# Altium PCB laser_show.PcbDoc (part 1 of 2)
Units mm, origin at the board's own origin, x right, y up, seen from the top; angles counter-clockwise.
Board outline 180 x 50 mm, 2 copper layers (Top Layer, Bottom Layer); 129 components, 122 nets, 459 pads, 223 vias.
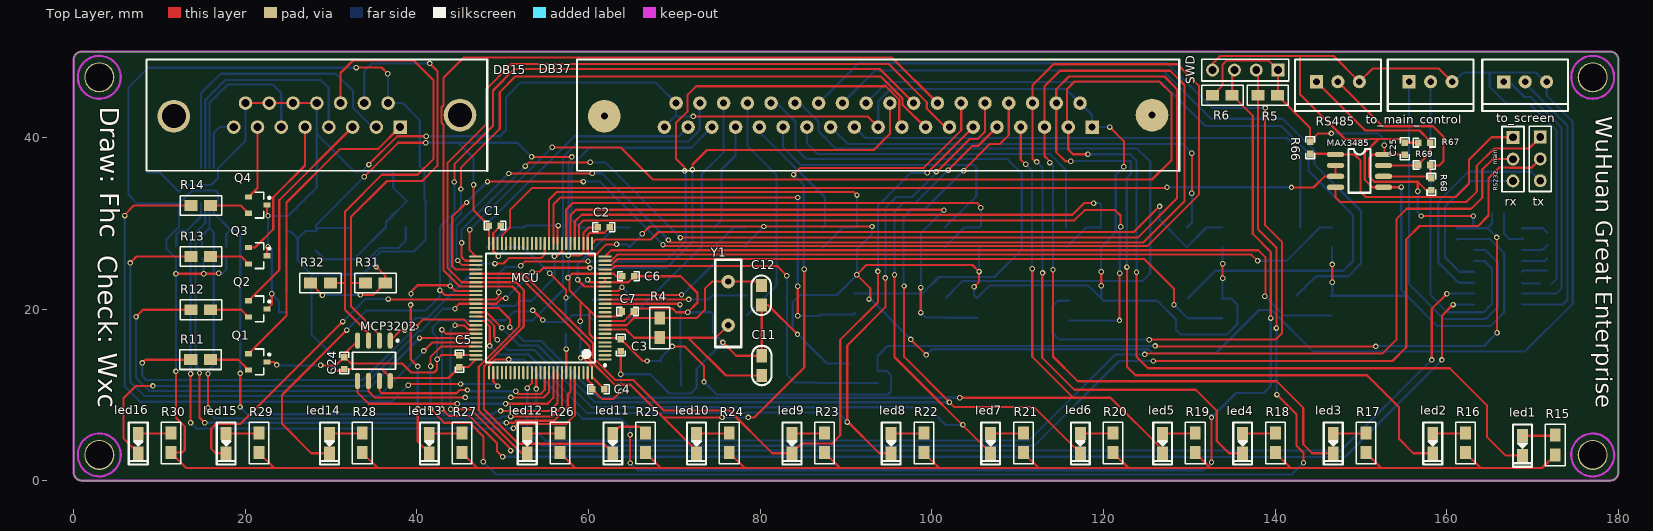
[diagram p0: Top Layer view]
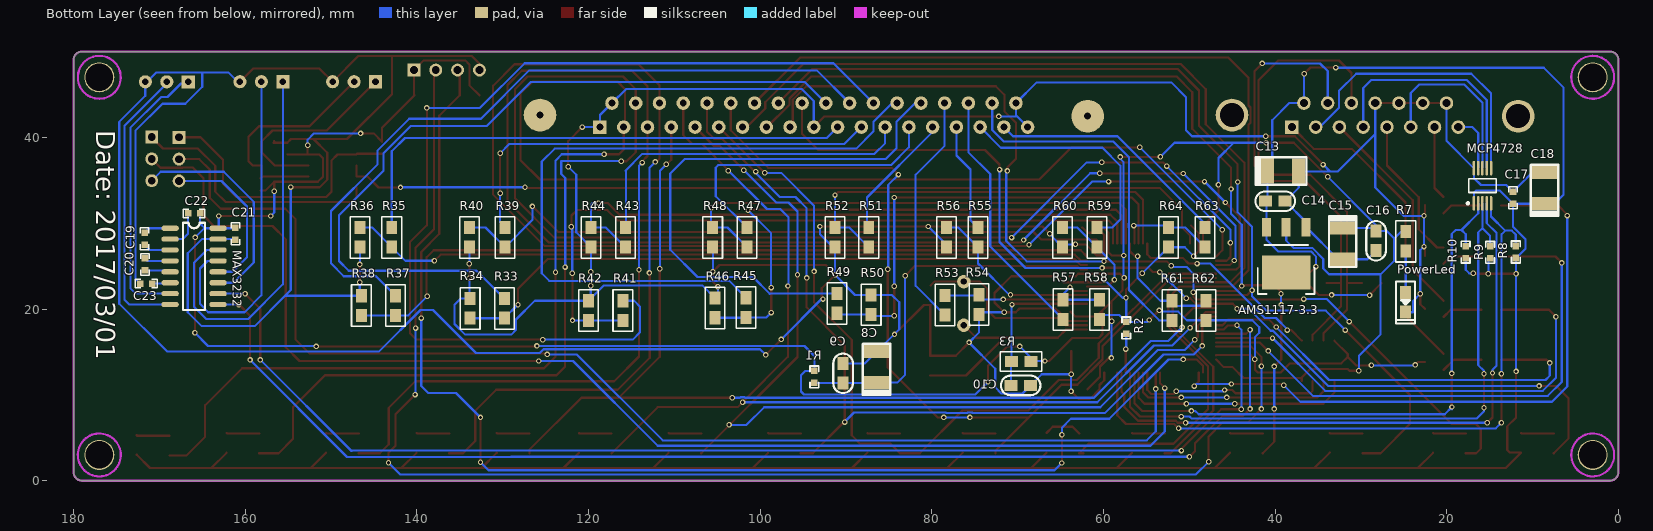
[diagram p1: Bottom Layer view, seen from below]

## Layer stack, top to bottom
Top Solder: solder mask 0.0102, Solder Resist, Dk 3.5
Top Layer: signal copper 0.0356
Dielectric 1: dielectric 0.32, FR-4, Dk 4.8
Bottom Layer: signal copper 0.0356
Bottom Solder: solder mask 0.0102, Solder Resist, Dk 3.5

## Board outline
1,0 cw(c1,1) 0,1 0,49 cw(c1,49) 1,50 179,50 cw(c179,49) 180,49 180,1 cw(c179,1) 179,0

## Design rules (kind name [scope] priority, off if disabled: settings)
Clearance [All] p1: gap=0.127 ignorepadtopadclearanceinfootprint=FALSE
PolygonConnect [All] p1: connectstyle=Relief reliefconductorwidth=0.254 reliefentries=4 polygonreliefangle="90 Angle" airgapwidth=0.254
RoutingVias [All] p1: holewidth=0.711 width=1.27 viastyle="Through Hole" minholewidth=0.381 minwidth=0.508 maxholewidth=0.711 maxwidth=1.27
SolderMaskExpansion [All] p1: expansion=0.102
Width [All] p1: maxlimit=0.254 minlimit=0.254 preferedwidth=0.254
30 further rules are at their usual default settings.

## Classes and differential pairs
component class laser_show_adc_uart: C19 C20 C21 C22 C23 C24 C25 MAX3232 MAX3485 MCP3202 R33 R34 R35 R36 R37 R38 R39 R40 R41 R42 R43 R44 R45 R46 R47 R48 R49 R50 R51 R52 R53 R54 R55 R56 R57 R58 R59 R60 R61 R62 R63 R64 R66 R67 R68 R69 RS485 rx to_main_control "to_main_control " to_screen tx
component class laser_show_peripheral: AMS1117-3.3 C13 C14 C15 C16 C17 C18 DB15 DB37 led1 led2 led3 led4 led5 led6 led7 led8 led9 led10 led11 led12 led13 led14 led15 led16 MCP4728 PowerLed Q1 Q2 Q3 Q4 R7 R8 R9 R10 R11 R12 R13 R14 R15 R16 R17 R18 R19 R20 R21 R22 R23 R24 R25 R26 R27 R28 R29 R30 R31 R32
component class laser_show_core: C1 C2 C3 C4 C5 C6 C7 C8 C9 C10 C11 C12 MCU R1 R2 R3 R4 R5 R6 SWD Y1

## Components (designator, comment, footprint, x,y, rotation, side; value= is the part's Value field where it differs from the comment)
AMS1117-3.3 "ASM1117" ASM1117 38.708,26.904 r0 bottom
C1 "104" 0603C 49.094,29.718 r180 top
C2 "104" 0603C 61.769,29.515 r180 top
C3 "104" 0603C 63.75,15.799 r90 top
C4 "104" 0603C 61.159,10.643 r0 top
C5 "104" 0603C 44.954,13.932 r270 top
C6 "104" 0603C 64.652,23.825 r180 top
C7 "104" 0603C 64.55,19.71 r180 top
C8 "10uF" 0805CAP_POL 86.433,13.233 r270 bottom
C9 "104" 0805C 90.344,12.522 r270 bottom
C10 "104" 0805C 69.643,11.1 r0 bottom
C11 "20pF" 0805C 80.184,13.411 r90 top
C12 "20pF" 0805C 80.133,21.615 r270 top
C13 "10uF" 0805CAP_POL 39.061,36.068 r0 bottom
C14 "104" 0805C 39.976,32.563 r0 bottom
C15 "10uF" 0805CAP_POL 32.153,27.61 r90 bottom
C16 "104" 0805C 28.241,27.94 r90 bottom
C17 "0.1uF" 0603C 12.29,32.969 r270 bottom
C18 "10uF" 0805CAP_POL 8.607,34.087 r270 bottom
C19 "0.1uF" 0603C 171.726,28.194 r90 bottom
C20 "0.1uF" 0603C 171.675,25.197 r90 bottom
C21 "0.1uF" 0603C 161.134,28.778 r270 bottom
C22 "0.1uF" 0603C 165.96,31.14 r180 bottom
C23 "0.1uF" 0603C 171.522,22.962 r180 bottom
C24 "0.1uF" 0603C 31.547,13.703 r270 top
C25 "0.1uF" 0603C 155.089,38.684 r90 top
DB15 "DB15" DB15/M 38.045,41.199 r0 top
DB37 "DB37" DB37/M 118.665,41.199 r0 top
led1 "red" 0805-LED 168.826,4.089 r270 top
led2 "red" 0805-LED 158.359,4.343 r270 top
led3 "red" 0805-LED 146.768,4.343 r270 top
led4 "red" 0805-LED 136.218,4.343 r270 top
led5 "red" 0805-LED 126.888,4.343 r270 top
led6 "red" 0805-LED 117.303,4.343 r270 top
led7 "red" 0805-LED 106.855,4.343 r270 top
led8 "red" 0805-LED 95.264,4.343 r270 top
led9 "red" 0805-LED 83.699,4.343 r270 top
led10 "red" 0805-LED 72.59,4.343 r270 top
led11 "red" 0805-LED 62.828,4.343 r270 top
led12 "red" 0805-LED 52.863,4.343 r270 top
led13 "red" 0805-LED 41.449,4.343 r270 top
led14 "red" 0805-LED 29.833,4.343 r270 top
led15 "red" 0805-LED 17.785,4.343 r270 top
led16 "red" 0805-LED 7.54,4.343 r270 top
MAX3232 "MAX3232" SO-16 168.754,29.413 r180 bottom
MAX3485 "MAX3485" so-8 147.037,37.998 r0 top
MCP3202 "MCP3202" SOIC8N_L 35.001,13.97 r270 top
MCP4728 "MCP4728" MSOP10 15.847,34.366 r90 bottom
MCU "STM32F1013VE" LQFP100_L 54.403,20.117 r180 top
PowerLed "Green" 0805-LED 24.812,20.777 r270 bottom
Q1 "9013" SOT23_L 21.459,13.843 r0 top
Q2 "9013" SOT23_L 21.459,20.015 r0 top
Q3 "9013" SOT23_L 21.459,26.213 r0 top
Q4 "9013" SOT23_L 21.459,32.106 r0 top
R1 "0" 0603R 93.675,12.09 r90 bottom
R2 "10K" 0603R 57.349,17.805 r270 bottom
R3 "10K" 0805R 69.592,13.868 r0 bottom
R4 "1M" 0805R 68.297,17.805 r270 top
R5 "10K" 0805R 139.137,44.907 r180 top
R6 "10K" 0805R 133.854,44.907 r0 top
R7 "1K" 0805R 24.787,27.889 r90 bottom
R8 "100K" 0603R 11.96,26.645 r270 bottom
R9 "10K" 0603R 14.957,26.594 r270 bottom
R10 "10K" 0603R 17.802,26.619 r270 bottom
R11 "10K" 0805R 14.804,14.097 r0 top
R12 "10K" 0805R 14.83,19.914 r0 top
R13 "10K" 0805R 14.83,26.111 r0 top
R14 "10K" 0805R 14.83,32.055 r0 top
R15 "1K" 0805R 172.633,4.156 r90 top
R16 "1K" 0805R 162.167,4.41 r90 top
R17 "1K" 0805R 150.575,4.41 r90 top
R18 "1K" 0805R 140.026,4.41 r90 top
R19 "1K" 0805R 130.695,4.41 r90 top
R20 "1K" 0805R 121.111,4.41 r90 top
R21 "1K" 0805R 110.663,4.41 r90 top
R22 "1K" 0805R 99.072,4.41 r90 top
R23 "1K" 0805R 87.506,4.41 r90 top
R24 "1K" 0805R 76.398,4.41 r90 top
R25 "1K" 0805R 66.636,4.41 r90 top
R26 "1K" 0805R 56.67,4.41 r90 top
R27 "1K" 0805R 45.257,4.41 r90 top
R28 "1K" 0805R 33.641,4.41 r90 top
R29 "1K" 0805R 21.592,4.41 r90 top
R30 "1K" 0805R 11.348,4.41 r90 top
R31 "10K" 0805R 35.175,23.038 r180 top
R32 "10K" 0805R 28.774,23.038 r0 top
R33 "10K" 0805R 129.805,20.074 r270 bottom
R34 "10K" 0805R 133.788,20.074 r90 bottom
R35 "10K" 0805R 142.922,28.346 r270 bottom
R36 "10K" 0805R 146.63,28.346 r270 bottom
R37 "10K" 0805R 142.488,20.404 r270 bottom
R38 "10K" 0805R 146.472,20.404 r90 bottom
R39 "10K" 0805R 129.714,28.346 r270 bottom
R40 "10K" 0805R 133.88,28.346 r270 bottom
R41 "10K" 0805R 116.005,19.82 r270 bottom
R42 "10K" 0805R 119.988,19.82 r90 bottom
R43 "10K" 0805R 115.693,28.346 r270 bottom
R44 "10K" 0805R 119.706,28.346 r270 bottom
R45 "10K" 0805R 101.647,20.168 r270 bottom
R46 "10K" 0805R 105.265,20.125 r90 bottom
R47 "10K" 0805R 101.52,28.346 r270 bottom
R48 "10K" 0805R 105.533,28.346 r270 bottom
R49 "10K" 0805R 91.03,20.65 r270 bottom
R50 "10K" 0805R 87.067,20.498 r90 bottom
R51 "10K" 0805R 87.347,28.346 r270 bottom
R52 "10K" 0805R 91.284,28.346 r270 bottom
R53 "10K" 0805R 78.482,20.447 r90 bottom
R54 "10K" 0805R 74.52,20.523 r270 bottom
R55 "10K" 0805R 74.621,28.346 r270 bottom
R56 "10K" 0805R 78.304,28.346 r270 bottom
R57 "10K" 0805R 64.715,19.939 r90 bottom
R58 "10K" 0805R 60.448,19.939 r270 bottom
R59 "10K" 0805R 60.753,28.346 r270 bottom
R60 "10K" 0805R 64.766,28.346 r270 bottom
R61 "10K" 0805R 52.036,19.82 r90 bottom
R62 "10K" 0805R 48.053,19.82 r270 bottom
R63 "10K" 0805R 48.18,28.346 r270 bottom
R64 "10K" 0805R 52.422,28.346 r270 bottom
R66 "10K" 0603R 144.065,38.798 r90 top
R67 "3.3K" 0603R 157.375,39.395 r180 top
R68 "3.3K" 0603R 158.213,34.519 r90 top
R69 "120" 0603R 157.391,36.779 r0 top
RS485 "Header 3" XH2.54_3P_Vertical 147.316,46.482 r270 top
rx "main" HDR1X3 167.712,40.005 r270 top
SWD "SWD" HDR1X4 140.331,47.839 r180 top
to_main_control "RS232_Connector" XH2.54_3P_Vertical 158.111,46.482 r270 top (schematic designator to_screen)
to_screen "RS232_Connector" XH2.54_3P_Vertical 169.135,46.473 r270 top (schematic designator to_main_control)
tx "RS232" HDR1X3 170.887,40.03 r270 top
Y1 "8M" XTAL1 76.276,18.11 r90 top

## Footprints (in the part's own frame and the unit in brackets; to place one, negate y for a bottom-side part, rotate by r counter-clockwise, add the part's x,y. Pads: shape width x height; smd on the part's side, far side on the other; paste and mask are expansions set on the pad)
0603C [mil]
  rect 30x30 smd: 1(-27.5,0) 2(27.5,0)
  silkscreen extent -50,-20 50,20
0603R [mil]
  rect 30x30 smd: 1(-27.5,0) 2(27.5,0)
  silkscreen extent -50,-20 50,20
0805-LED [mil]
  rect 60x50 smd: 1(-45,0) 2(45,0)
  silkscreen extent -96,-43 97,43
0805C [mil] "capacitance"
  rect 60x50 smd: 1(-45,0) 2(45,0)
  silkscreen extent -90,-45 91,45
0805CAP_POL [mm] "CAP_POLAR"
  rect 1.524x3 smd: 1(1.813,-0.038) 2(-1.813,0.038)
  silkscreen extent -2.71,-1.61 3.21,1.59
0805R [mil] "resistor"
  rect 60x50 smd: 1(45,0) 2(-45,0)
  silkscreen extent -95,-45 95,45
ASM1117 [mm] "ASM1117"
  rect 1.05x2.15 smd: 1(-2.3,-2.647) 2(0,-2.647) 3(2.3,-2.647)
  rect 5.6x4 smd: ""(-0.002,2.647)
  silkscreen extent -3.28,-0.55 3.32,5.14
DB15/M [mil]
  rect 62x62 hole 38: 1(0,0)
  round 62 hole 38: 2(-109,0) 3(-218,0) 4(-327,0) 5(-436,0) 6(-545,0) 7(-654,0) 8(-763,0) 9(-55,110) 10(-164,110) 11(-273,110) 12(-382,110) 13(-491,110) 14(-600,110) 15(-709,110)
  round 150 hole 110: ""(-1038,50) ""(275,55)
  silkscreen extent -1163,-200 400,310
DB37/M [mil]
  round 150 hole 32: 0(-2237,50) 0(275,55)
  rect 62x62 hole 32: 1(0,0)
  round 62 hole 32: 2(-109,0) 3(-218,0) 4(-327,0) 5(-436,0) 6(-545,0) 7(-654,0) 8(-763,0) 9(-872,0) 10(-981,0) 11(-1090,0) 12(-1199,0) 13(-1308,0) 14(-1417,0) 15(-1526,0) 16(-1635,0) 17(-1744,0) 18(-1853,0) 19(-1962,0) 20(-55,110) 21(-164,110) 22(-273,110) 23(-382,110) 24(-491,110) 25(-600,110) 26(-709,110) 27(-818,110) 28(-927,110) 29(-1036,110) 30(-1145,110) 31(-1254,110) 32(-1363,110) 33(-1472,110) 34(-1581,110) 35(-1690,110) 36(-1799,110) 37(-1908,110)
  silkscreen extent -2362,-200 400,310
HDR1X3 [mm] "Connector; Header; 3 Position"
  rect 1.5x1.5 hole 0.9: 1(0,0)
  round 1.5 hole 0.9: 2(2.54,0) 3(5.08,0)
  silkscreen extent -1.27,-1.27 6.35,1.27
HDR1X4 [mm] "Connector; Header; 4 Position"
  rect 1.5x1.5 hole 0.9: 1(0,0)
  round 1.5 hole 0.9: 2(2.54,0) 3(5.08,0) 4(7.62,0)
  silkscreen extent -1.27,-1.27 8.89,1.27
LQFP100_L [mm]
  oval 1.55x0.25 smd: 1(-7.525,6) 2(-7.525,5.5) 3(-7.525,5) 4(-7.525,4.5) 5(-7.525,4) 6(-7.525,3.5) 7(-7.525,3) 8(-7.525,2.5) 9(-7.525,2) 10(-7.525,1.5) 11(-7.525,1) 12(-7.525,0.5) 13(-7.525,0) 14(-7.525,-0.5) 15(-7.525,-1) 16(-7.525,-1.5) 17(-7.525,-2) 18(-7.525,-2.5) 19(-7.525,-3) 20(-7.525,-3.5) 21(-7.525,-4) 22(-7.525,-4.5) 23(-7.525,-5) 24(-7.525,-5.5) 25(-7.525,-6) 51(7.525,-6) 52(7.525,-5.5) 53(7.525,-5) 54(7.525,-4.5) 55(7.525,-4) 56(7.525,-3.5) 57(7.525,-3) 58(7.525,-2.5) 59(7.525,-2) 60(7.525,-1.5) 61(7.525,-1) 62(7.525,-0.5) 63(7.525,0) 64(7.525,0.5) 65(7.525,1) 66(7.525,1.5) 67(7.525,2) 68(7.525,2.5) 69(7.525,3) 70(7.525,3.5) 71(7.525,4) 72(7.525,4.5) 73(7.525,5) 74(7.525,5.5) 75(7.525,6)
  oval 0.25x1.55 smd: 26(-6,-7.525) 27(-5.5,-7.525) 28(-5,-7.525) 29(-4.5,-7.525) 30(-4,-7.525) 31(-3.5,-7.525) 32(-3,-7.525) 33(-2.5,-7.525) 34(-2,-7.525) 35(-1.5,-7.525) 36(-1,-7.525) 37(-0.5,-7.525) 38(0,-7.525) 39(0.5,-7.525) 40(1,-7.525) 41(1.5,-7.525) 42(2,-7.525) 43(2.5,-7.525) 44(3,-7.525) 45(3.5,-7.525) 46(4,-7.525) 47(4.5,-7.525) 48(5,-7.525) 49(5.5,-7.525) 50(6,-7.525) 76(6,7.525) 77(5.5,7.525) 78(5,7.525) 79(4.5,7.525) 80(4,7.525) 81(3.5,7.525) 82(3,7.525) 83(2.5,7.525) 84(2,7.525) 85(1.5,7.525) 86(1,7.525) 87(0.5,7.525) 88(0,7.525) 89(-0.5,7.525) 90(-1,7.525) 91(-1.5,7.525) 92(-2,7.525) 93(-2.5,7.525) 94(-3,7.525) 95(-3.5,7.525) 96(-4,7.525) 97(-4.5,7.525) 98(-5,7.525) 99(-5.5,7.525) 100(-6,7.525)
  silkscreen extent -7.65,-6.35 6.35,6.8
MSOP10 [mm] "MCP4728"
  oval 1.7x0.3 smd: 1(-2.05,1) 2(-2.05,0.5) 3(-2.05,0) 4(-2.05,-0.5) 5(-2.05,-1) 6(2.05,-1) 7(2.05,-0.5) 8(2.05,0) 9(2.05,0.5) 10(2.05,1)
  silkscreen extent -2.17,-1.6 0.8,1.83, body extent -1.6,-1.6 1.6,1.6, height 1.1
so-8 [mil]
  oval 80x24 smd: 1(0,0) 2(0,-50) 3(0,-100) 4(0,-150) 5(220,-150) 6(220,-100) 7(220,-50) 8(220,0)
  silkscreen extent 60,-175 160,25
SO-16 [mil]
  oval 80x24 smd: 1(0,0) 2(0,-50) 3(0,-100) 4(0,-150) 5(0,-200) 6(0,-250) 7(0,-300) 8(0,-350) 9(220,-350) 10(220,-300) 11(220,-250) 12(220,-200) 13(220,-150) 14(220,-100) 15(220,-50) 16(220,0)
  silkscreen extent 60,-375 160,25
SOIC8N_L [mm] "8-Pin Small Outline Integrated Circuit 1.27 mm Pitch, IPC High Density"
  oval 1.9x0.6 smd: 1(-2.35,1.905) 2(-2.35,0.635) 3(-2.35,-0.635) 4(-2.35,-1.905) 5(2.35,-1.905) 6(2.35,-0.635) 7(2.35,0.635) 8(2.35,1.905)
  silkscreen extent -2.47,-2.5 1,2.88, body extent -1.95,-2.45 1.95,2.45, height 1.75
SOT23_L [mm] "SOT23, 3-Leads, Body 2.9x1.3mm, Pitch 0.95mm, Lead Span 2.3mm - Reverse Pinning, IPC High Density"
  rect 0.85x0.6 smd: 1(1.075,0) 2(-1.075,-0.95) 3(-1.075,0.95)
  silkscreen extent -0.3,-1.5 1.48,1.5, body extent -0.7,-1.5 0.7,1.5, height 1.1
XH2.54_3P_Vertical [mil]
  rect 60x60 hole 30: 1(0,-98.43)
  round 60 hole 30: 2(0,0) 3(0,98.43)
  silkscreen extent -102,-197 134,197
XTAL1 [mil]
  round 62 hole 28: 1(0,0) 2(200,0)
  silkscreen extent -100,-60 300,60

## Part data
C1 C2 C3 C4 C5 C6 C7 C9 C14 C16 C17 C19 C20 C21 C22 C23 C24 C25: library part CAP, "capacitance"
C8 C13 C15 C18: library part CAP_Polar, "Cap polar"
C10 C11 C12: library part Cap, "capacitance"
led1 led2 led3 led4 led5 led6 led7 led8 led9 led10 led11 led12 led13 led14 led15 led16 PowerLed: library part LED, "LED"
MAX3232: library part MAX232, "+5V Powered, Multi-Channel RS-232 Driver/Receiver", Code_IPC=SOIC127P600-16, Code_JEDEC=MS-012-AC, ComponentLink1Description="Manufacturer Link", ComponentLink1URL=http://www.maxim-ic.com/, ComponentLink2Description=Datasheet, ComponentLink2URL=http://pdfserv.maxim-ic.com/en/ds/MAX220-MAX249.pdf, LatestRevisionDate=13-Apr-2006, LatestRevisionNote="IPC-7351 Footprint Added.", PackageDescription="16-Pin Small Outline Integrated Circuit 1.27 mm Pitch", PackageReference=NSO16, Published=16-Jan-2001, Publisher="Altium Limited"
MAX3485: library part MAX485
MCU: library part STM32F103VET6, "STM32F1013VET6"
Q1 Q2 Q3 Q4: library part 2N3904, "NPN General Purpose Amplifier", ComponentLink1Description="Manufacturer Link", ComponentLink1URL=http://www.fairchildsemi.com/, ComponentLink2Description=Datasheet, ComponentLink2URL=http://www.fairchildsemi.com/ds/2N%2F2N3904.pdf, DatasheetVersion=1997, LatestRevisionDate=15-Jan-2003, LatestRevisionNote="PCB Footprint 'BCY-W3/D4.7' replaced", PackageDescription="TO, Flat Index; 3 In-Line, Axial Leads; Body Dia. 4.5mm; Leads 0.51 x 0.48 mm (max)", PackageReference=TO-92A, PackageVersion=Sep-1998, Published=8-Jun-2000, Publisher="Altium Limited"
R1 R2 R5 R6 R7 R8 R9 R10 R11 R12 R13 R14 R15 R16 R17 R18 R19 R20 R21 R22 R23 R24 R25 R26 R27 R28 R29 R30 R31 R32 R33 R34 R35 R36 R37 R38 R39 R40 R41 R42 R43 R44 R45 R46 R47 R48 R49 R50 R51 R52 R53 R54 R55 R56 R57 R58 R59 R60 R61 R62 R63 R64 R66 R67 R68 R69: library part RES, "resistor"
R3 R4: library part Res, "resistor"
RS485: "Header, 3-Pin", LatestRevisionDate=17-Jul-2002, LatestRevisionNote="Re-released for DXP Platform.", Publisher="Altium Limited"
rx to_main_control to_screen tx: library part "Header 3", "Header, 3-Pin", LatestRevisionDate=17-Jul-2002, LatestRevisionNote="Re-released for DXP Platform.", Publisher="Altium Limited"
SWD: library part "Header 4", "Header, 4-Pin", LatestRevisionDate=17-Jul-2002, LatestRevisionNote="Re-released for DXP Platform.", Publisher="Altium Limited"
Y1: "crystal"

## Free pads (board coordinates)
  round 3.5 hole 3.2: 1(3,47) 2(3,3) 3(177,47) 4(177,3)

## Via types
v1: diameter 0.635, hole 0.381, Top Layer to Bottom Layer, 223 vias

## Nets (pads, with @x,y where several pads share a name; then routed paths per layer and width w, separated by ;. In a path a pad name is that pad's centre, name@x,y a point inside that pad or via, vN(x,y) a via of type N, cw(c..) or ccw(c..) an arc to the next point about the centre after c; other vN are vias at no path point)
3.3V: AMS1117-3.3.2 C1.2 C2.2 C3.2 C4.2 C5.2 C6.2 C7.2 C15.1 C16.2 C21.1 C22.2 C24.2 C25.1 MAX3232.16 MAX3485.8 MCP3202.8 MCU.6 MCU.11 MCU.21 MCU.28 MCU.50 MCU.75 MCU.100 R1.2 R3.2 R5.2 R6.2 R7.1 R66.2 R68.1 SWD.1 | length 353.8
  Top Layer w0.254: v1(30.248,12.805) 31.347,12.805 C24.2@31.547,13.005 35.916,13.005 36.906,12.014 MCP3202.8@36.906,11.62 ; v1(33.88,35.408) 37.842,39.37 v1(41.043,39.37) ; MCP3202.8@37.086,11.963 43.684,11.963 C5.2@44.954,13.233 45.995,13.233 MCU.75@46.878,14.117 ; v1(46.605,34.468) 46.605,31.509 C1.2@48.396,29.718 48.403,29.711 MCU.50@48.403,27.642 MCU.50@48.396,27.649 ; v1(53.362,37.744) 53.387,37.719 v1(58.061,37.719) ; v1(57.654,26.238) 59.051,26.238 59.403,26.59 MCU.28@59.403,27.642 59.403,28.851 60.067,29.515 C2.2@61.071,29.515 ; v1(59.051,18.567) 59.051,20.904 ; v1(59.077,14.3) 59.396,14.3 60.403,13.293 MCU.100@60.403,12.592 60.403,12.098 C4.2@61.858,10.643 ; C7.2@63.852,19.71 63.258,19.117 MCU.11@61.928,19.117 60.839,19.117 60.105,19.85 ; C6.2@63.953,23.825 63.242,23.825 62.951,24.117 MCU.21@61.928,24.117 58.073,24.117 v1(57.603,23.647) 57.781,23.47 57.781,22.174 59.051,20.904 ; v1(66.824,13.945) 66.303,13.945 C3.2@63.75,16.497 63.631,16.617 MCU.6@61.928,16.617 60.57,16.617 60.105,17.081 60.105,19.85 ; v1(69.77,15.646) 71.192,15.646 73.453,13.386 v1(73.453,11.506) ; v1(126.006,15.697) 126.056,15.646 v1(151.736,15.646) ; R6.2@132.711,44.907 133.88,46.076 133.88,48.489 134.362,48.971 139.199,48.971 SWD.1@140.331,47.839 140.331,44.958 R5.2@140.28,44.907 144.065,41.123 R66.2@144.065,39.497 145.03,40.462 v1(146.554,40.462) ; v1(152.726,39.091) 152.726,38.1 MAX3485.8@152.625,37.998 ; C25.1@155.089,37.986 155.076,37.998 MAX3485.8@152.625,37.998 ; v1(156.613,33.731) 156.613,34.823 ; v1@156.943,30.759 v1(157.019,30.836) v1(163.09,30.836) ; R68.1@158.213,33.82 157.616,33.82 156.613,34.823 ; v1(165.833,28.346) 165.858,28.321 v1(165.858,17.221) ; 59.051,20.904 60.105,19.85 ; MAX3485.8@152.625,37.998 151.38,37.998 150.923,37.541 150.923,35.433 151.533,34.823 156.613,34.823
  Bottom Layer w0.254: R7.1@24.787,29.032 25.32,29.032 26.133,28.219 ; v1(30.248,12.805) 30.248,14.529 27.708,17.069 27.708,24.054 ; C15.1@32.115,29.422 28.58,29.422 C16.2@28.241,29.083 ; v1(33.88,35.408) 28.241,29.769 C16.2@28.241,29.083 ; AMS1117-3.3.2@38.708,29.55 38.708,27.967 37.868,27.127 35.683,27.127 34.388,25.832 34.388,24.714 33.727,24.054 27.708,24.054 ; v1(41.043,39.37) 44.827,39.37 ; v1(46.605,34.468) 46.605,37.592 44.827,39.37 ; v1(53.362,37.744) 51.736,39.37 44.827,39.37 ; v1(57.603,23.647) 57.654,23.698 v1(57.654,26.238) 57.654,37.109 58.061,37.516 v1(58.061,37.719) ; v1(59.051,18.567) 59.051,14.326 v1(59.077,14.3) ; v1(66.824,13.945) 68.373,13.945 R3.2@68.449,13.868 68.449,14.326 v1(69.77,15.646) ; v1(73.453,11.506) 74.926,10.033 94.894,10.033 95.25,10.389 95.25,12.294 94.755,12.789 R1.2@93.675,12.789 93.675,14.529 94.844,15.697 v1(126.006,15.697) ; v1(146.554,40.462) 151.99,40.462 152.726,39.726 v1(152.726,39.091) ; v1(151.736,15.646) 151.787,15.697 164.334,15.697 v1(165.858,17.221) ; v1(156.613,33.731) 156.613,31.242 v1(157.019,30.836) ; C21.1@161.134,29.477 161.197,29.413 MAX3232.16@163.166,29.413 ; v1(163.09,30.836) 163.09,29.489 MAX3232.16@163.166,29.413 ; C22.2@165.261,31.14 165.261,29.959 164.715,29.413 ; v1(165.833,28.346) 164.766,29.413 164.715,29.413 ; 26.133,28.219 26.133,25.629 27.708,24.054 ; 26.133,28.219 26.996,29.083 C16.2@28.241,29.083 ; MAX3232.16@163.166,29.413 164.715,29.413
5V: AMS1117-3.3.3 C13.1 C14.2 C17.2 C18.1 DB15.9 MCP4728.1 R8.2 R9.2 R10.2 R15.2 R16.2 R17.2 R18.2 R19.2 R20.2 R21.2 R22.2 R23.2 R24.2 R25.2 R26.2 R27.2 R28.2 R29.2 R30.2 R31.2 R32.2 | length 338.4
  Top Layer w0.254: v1(11.934,12.725) 11.934,7.341 12.95,6.325 12.95,3.581 12.636,3.267 R30.2@11.348,3.267 13.142,1.473 23.387,1.473 ; v1(11.934,24.105) v1(15.16,24.105) 16.862,24.105 v1(16.913,24.155) ; R29.2@21.592,3.267 23.387,1.473 ; R32.2@27.631,23.038 27.631,22.987 v1(29.003,21.615) ; v1(32.94,48.133) 35.886,48.133 v1(36.623,47.396) ; v1(33.423,21.641) 34.921,21.641 R31.2@36.318,23.038 36.318,23.876 v1(35.251,24.943) ; R28.2@33.641,3.267 35.435,1.473 ; R27.2@45.257,3.267 47.051,1.473 ; R26.2@56.67,3.267 58.464,1.473 ; R25.2@66.636,3.267 68.43,1.473 ; R24.2@76.398,3.267 78.192,1.473 ; R23.2@87.506,3.267 89.301,1.473 ; R22.2@99.072,3.267 100.866,1.473 ; R21.2@110.663,3.267 112.457,1.473 ; R20.2@121.111,3.267 122.905,1.473 ; R19.2@130.695,3.267 130.695,3.24 132.462,1.473 132.49,1.473 ; R18.2@140.026,3.267 141.82,1.473 ; R17.2@150.575,3.267 152.37,1.473 ; R16.2@162.167,3.267 163.961,1.473 ; R15.2@172.633,3.013 171.093,1.473 163.961,1.473 ; 23.387,1.473 35.435,1.473 ; 35.435,1.473 47.051,1.473 ; 47.051,1.473 58.464,1.473 ; 58.464,1.473 68.43,1.473 ; 68.43,1.473 78.192,1.473 ; 78.192,1.473 89.301,1.473 ; 89.301,1.473 100.866,1.473 ; 100.866,1.473 112.457,1.473 ; 112.457,1.473 122.905,1.473 ; 122.905,1.473 122.918,1.46 132.477,1.46 132.49,1.473 ; 132.49,1.473 141.82,1.473 ; 141.82,1.473 152.37,1.473 ; 152.37,1.473 163.961,1.473
  Bottom Layer w0.254: v1(11.934,12.725) v1(11.934,24.105) 11.934,25.921 10.842,27.013 10.842,28.143 12.29,29.591 C17.2@12.29,32.271 ; R9.2@14.957,25.895 15.16,25.692 v1(15.16,24.105) ; MCP4728.1@16.847,32.316 16.847,33.518 16.557,33.807 13.827,33.807 C17.2@12.29,32.271 ; v1(16.913,24.155) 17.395,24.155 17.802,24.562 R10.2@17.802,25.921 ; v1(29.003,21.615) 29.028,21.641 v1(33.423,21.641) ; v1(32.94,48.133) 32.915,48.108 8.708,48.108 6.422,45.822 6.422,33.274 7.422,32.274 C18.1@8.645,32.274 8.648,32.271 C17.2@12.29,32.271 ; v1(35.251,24.943) 35.251,26.137 35.81,26.695 39.646,26.695 41.008,28.058 AMS1117-3.3.3@41.008,29.55 41.008,32.452 C14.2@41.119,32.563 40.874,32.808 C13.1@40.874,36.106 40.331,36.648 40.331,42.012 38.35,43.993 DB15.9@36.648,43.993 36.648,47.371 v1(36.623,47.396)
blue_channel1_adc: MCU.18 R59.1 R60.2 | length 13.1
  Top Layer w0.254: v1(58.721,23.419) 59.523,22.617 MCU.18@61.928,22.617
  Bottom Layer w0.254: v1(58.721,23.419) 58.721,25.171 R59.1@60.753,27.203 63.039,29.489 R60.2@64.766,29.489
blue_channel1_adc_con: DB37.17 R59.2 | length 27.6
  Bottom Layer w0.254: R59.2@60.753,29.489 58.975,29.489 58.035,30.429 58.035,36.703 60.118,38.786 71.954,38.786 DB37.17@74.367,41.199
blue_channel1_state: DB37.27 led14.2 MCU.60 | length 116.2
  Top Layer w0.254: led14.2@29.833,3.2 27.708,3.2 24.279,6.629 24.279,9.982 v1(31.848,17.551) ; v1(42.694,22.2) 43.276,21.617 MCU.60@46.878,21.617 ; v1(44.37,34.798) 44.37,36.855 48.866,41.351 48.866,45.466 51.355,47.955 93.925,47.955 DB37.27@97.888,43.993
  Bottom Layer w0.254: v1(31.848,17.551) 34.108,19.812 41.017,19.812 42.694,21.488 v1(42.694,22.2) 42.694,29.591 44.37,31.267 v1(44.37,34.798)
blue_channel2_adc: MCU.33 R61.1 R62.2 | length 14.1
  Top Layer w0.254: v1(56.029,26.137) 56.333,26.137 56.903,26.706 MCU.33@56.903,27.642
  Bottom Layer w0.254: R62.2@48.053,20.963 48.632,20.383 50.931,20.383 50.944,20.371 51.457,20.371 52.036,20.951 R61.1@52.036,20.963 53.369,20.963 56.041,23.635 56.041,26.124 v1(56.029,26.137)
blue_channel2_adc_con: DB37.36 R61.2 | length 42.3
  Bottom Layer w0.254: R61.2@52.036,18.677 53.496,18.677 57.032,22.212 57.032,29.456 57.057,29.481 57.057,29.955 57.032,29.98 57.032,37.681 58.873,39.522 71.624,39.522 72.97,40.869 DB37.36@72.97,43.993
blue_channel2_state: DB37.9 led15.2 MCU.61 | length 117.3
  Top Layer w0.254: led15.2@17.785,3.2 16.582,3.2 16.049,3.734 16.049,6.045 16.608,6.604 19.427,6.604 v1(31.365,18.542) ; v1@36.699,21.117 MCU.61@46.878,21.117 49.205,21.117 49.526,21.438 v1(49.526,21.946) ; v1(52.117,25.044) 52.625,25.552 v1(59.94,25.552) ; v1(71.192,36.093) 71.192,36.5 70.202,37.49 70.202,41.707 71.548,43.053 71.548,44.958 72.539,45.949 94.636,45.949 96.211,44.373 96.211,41.504 DB37.9@96.516,41.199
  Bottom Layer w0.254: v1(31.365,18.542) 33.981,21.158 v1(36.674,21.158) ; v1(49.526,21.946) 49.526,24.105 50.314,24.892 51.965,24.892 v1(52.117,25.044) ; v1(59.94,25.552) 68.957,25.552 71.332,27.927 71.332,35.954 v1(71.192,36.093)
blue_dac_output: DB15.6 MCP4728.8 | length 21.2
  Bottom Layer w0.254: MCP4728.8@15.847,36.416 15.847,44.044 17.954,46.152 23.212,46.152 24.202,45.161 DB15.6@24.202,41.199
blue_enable: DB15.5 Q3.3 | length 17.2
  Top Layer w0.254: Q3.3@20.384,27.163 21.139,27.163 23.263,29.286 23.263,33.02 26.971,36.728 DB15.5@26.971,41.199
blue_enable_pin: MCU.71 R13.2 | length 65.6
  Top Layer w0.254: v1(6.6,25.375) 7.337,26.111 R13.2@13.687,26.111 ; 41.373,15.646 40.839,15.113 v1(40.814,15.113) 41.818,16.117 MCU.71@46.878,16.117
  Bottom Layer w0.254: v1(6.6,25.375) 6.6,11.506 8.226,9.881 35.607,9.881 40.814,15.088 v1(40.814,15.113)
CS: MCP3202.1 MCU.37 | length 23.5
  Top Layer w0.254: MCP3202.1@36.906,16.32 38.138,17.551 v1(38.596,17.551) ; v1(49.094,25.298) 50.085,25.298 50.72,25.933 54.454,25.933 54.903,26.383 MCU.37@54.903,27.642
  Bottom Layer w0.254: v1(38.596,17.551) 38.596,17.64 39.904,18.948 41.22,18.948 47.57,25.298 v1(49.094,25.298)
DE: MAX3485.2 MAX3485.3 MCU.47 | length 103.4
  Top Layer w0.254: MCU.47@49.903,27.642 49.903,28.52 50.834,29.451 50.834,31.509 53.438,34.112 127.326,34.112 v1(127.403,34.188) ; v1(141.906,34.163) 144.471,34.163 145.767,35.458 MAX3485.3@147.037,35.458 MAX3485.2@147.037,36.728
  Bottom Layer w0.254: v1(127.403,34.188) 141.881,34.188 v1(141.906,34.163)
GND: AMS1117-3.3.1 C1.1 C2.1 C3.1 C4.1 C5.1 C6.1 C7.1 C8.2 C9.1 C10.1 C11.2 C12.2 C13.2 C14.1 C15.2 C16.1 C17.1 C18.2 C21.2 C23.1 C24.1 C25.2 DB15.12 DB15.13 DB15.14 DB15.15 DB37.1 DB37.10 DB37.19 DB37.20 DB37.37 MAX3232.15 MAX3485.5 MCP3202.4 MCP4728.10 MCU.10 MCU.19 MCU.20 MCU.27 MCU.49 MCU.74 MCU.99 PowerLed.2 Q1.1 Q2.1 Q3.1 Q4.1 R2.1 R34.1 R36.1 R38.1 R40.1 R42.1 R44.1 R46.1 R48.1 R50.1 R52.1 R54.1 R56.1 R58.1 R60.1 R62.1 R64.1 R67.2 RS485.3 SWD.4 to_main_control.3 to_screen.3 | length 788.8
  Top Layer w0.254: DB15.15@20.037,43.993 DB15.14@22.805,43.993 DB15.13@25.574,43.993 DB15.12@28.343,43.993 ; Q1.1@22.534,13.843 23.317,13.843 v1(23.673,13.487) ; Q2.1@22.534,20.015 23.085,20.566 v1(23.085,21.768) ; Q3.1@22.534,26.213 22.534,27.157 v1(22.657,27.28) ; Q4.1@22.534,32.106 22.534,30.984 v1(22.657,30.861) ; v1(28.778,13.437) 30.582,13.437 C24.1@31.547,14.402 ; MCP3202.4@33.096,16.32 31.547,14.771 C24.1@31.547,14.402 ; v1(34.413,36.83) 37.715,40.132 v1(41.093,40.132) ; MCU.74@46.878,14.617 46.864,14.63 C5.1@44.954,14.63 42.846,14.63 v1(42.363,14.148) 42.363,12.95 42.012,12.598 39.345,12.598 38.278,13.665 32.283,13.665 C24.1@31.547,14.402 ; v1(49.501,26.162) 48.903,26.76 MCU.49@48.903,27.642 48.903,28.828 C1.1@49.793,29.718 ; v1(53.489,19.837) 53.539,19.837 v1(54.657,18.72) ; v1(55.47,24.155) 57.375,22.25 v1(57.375,21.311) ; v1(59.889,23.419) 60.191,23.117 MCU.19@61.928,23.117 ; MCU.99@59.903,12.592 59.903,11.698 60.461,11.14 C4.1@60.461,10.643 61.604,9.5 62.861,9.5 v1(63.776,10.414) ; MCU.10@61.928,18.617 64.155,18.617 C7.1@65.249,19.71 65.604,20.066 69.795,20.066 70.227,19.634 v1(71.573,19.634) 72.691,20.752 72.691,21.869 70.735,23.825 C6.1@65.35,23.825 64.642,23.117 MCU.19@61.928,23.117 ; MCU.20@61.928,23.617 MCU.19@61.928,23.117 ; C2.1@62.467,29.515 61.832,28.88 60.169,28.88 59.903,28.614 MCU.27@59.903,27.642 59.903,26.453 60.093,26.264 60.804,26.264 62.074,27.534 v1(63.268,27.534) ; v1(63.75,12.395) C3.1@63.75,15.1 ; v1(66.265,28.778) 67.103,29.616 v1(80.413,29.616) v1(93.036,29.616) ; v1(72.208,42.443) 92.503,42.443 DB37.10@93.748,41.199 ; v1(75.663,16.104) 77.212,14.554 C11.2@80.184,14.554 80.184,20.422 C12.2@80.133,20.472 80.921,20.472 v1(84.35,17.043) ; v1@92.833,21.158 92.833,22.428 v1(91.258,24.003) 92.376,25.121 104.746,25.121 v1(105.508,24.359) 105.508,23.165 v1(104.924,22.581) ; v1(97.558,16.459) v1(99.361,14.656) ; v1(119.732,22.708) v1(119.732,24.333) ; v1(120.722,41.199) 122.373,39.548 v1(122.373,36.576) ; SWD.4@132.711,47.839 132.711,48.59 133.6,49.479 146.819,49.479 RS485.3@149.816,46.482 151.366,48.031 159.062,48.031 to_main_control.3@160.611,46.482 ; v1(133.88,23.597) v1(133.88,25.273) ; 142.897,49.327 142.897,45.034 148.129,39.802 152.041,39.802 ; v1(146.656,23.114) v1(146.656,25.197) ; v1(154.708,34.214) 154.682,34.188 MAX3485.5@152.625,34.188 151.329,34.188 150.44,35.077 150.44,38.202 152.041,39.802 ; R67.2@156.575,39.497 R67.2@156.651,39.573 ; R67.2@156.676,39.395 156.663,39.383 C25.2@155.089,39.383 154.67,39.802 152.041,39.802
  Bottom Layer w0.254: C18.2@8.57,35.899 10.058,35.899 C17.1@12.29,33.668 13.065,34.442 16.024,34.442 16.847,35.265 MCP4728.10@16.847,36.416 20.037,39.606 DB15.15@20.037,43.993 ; v1(23.673,13.487) 23.724,13.437 v1(28.778,13.437) ; PowerLed.2@24.812,19.634 23.948,19.634 23.948,20.904 v1(23.085,21.768) 23.085,26.852 v1(22.657,27.28) v1(22.657,30.861) 22.682,30.836 25.015,30.836 28.343,34.163 28.343,40.386 ; C16.1@28.241,26.797 29.241,25.797 C15.2@32.19,25.797 32.655,25.797 AMS1117-3.3.1@36.408,29.55 36.408,30.138 C14.1@38.833,32.563 37.249,34.147 C13.2@37.249,36.03 33.614,36.03 ; DB15.12@28.343,43.993 28.343,40.386 ; v1(34.413,36.83) 33.614,36.03 ; v1@41.119,40.107 v1(41.093,40.132) 49.679,40.132 50.39,40.843 50.39,44.679 52.117,46.406 67.789,46.406 DB37.37@70.202,43.993 70.202,42.57 70.075,42.443 ; v1(42.363,14.148) 42.363,16.713 41.855,17.221 41.855,17.882 42.656,18.682 50.285,18.682 51.296,19.693 53.344,19.693 v1(53.489,19.837) ; v1(49.501,26.162) 50.542,27.203 R64.1@52.422,27.203 v1(55.47,24.155) ; v1(54.657,18.72) 54.873,18.504 R2.1@57.349,18.504 ; v1(59.889,23.419) 57.781,21.311 v1(57.375,21.311) 57.349,21.285 R2.1@57.349,18.504 ; R58.1@60.448,18.796 59.94,19.304 58.15,19.304 R2.1@57.349,18.504 ; v1(63.268,27.534) 64.436,27.534 R60.1@64.766,27.203 66.265,28.702 v1(66.265,28.778) ; v1(63.776,10.414) 63.776,12.37 v1(63.75,12.395) 67.205,12.395 C10.1@68.5,11.1 69.44,10.16 71.904,10.16 72.615,10.871 72.615,13.056 v1(75.663,16.104) 74.52,17.247 R54.1@74.52,19.38 74.266,19.634 v1(71.573,19.634) ; DB37.19@68.83,41.199 70.075,42.443 ; v1(72.208,42.443) 70.075,42.443 ; R56.1@78.304,27.203 78.304,27.508 v1(80.413,29.616) ; v1@84.35,17.018 v1(84.35,17.043) ; v1@84.374,17.068 83.804,17.638 83.804,20.79 84.654,21.641 R50.1@87.067,21.641 88.947,21.641 v1@91.284,23.978 ; v1@84.386,17.055 C8.2@86.395,15.046 87.776,13.665 C9.1@90.344,13.665 ; v1@91.284,24.003 91.284,26.975 93.036,28.727 v1(93.036,29.616) ; v1(92.681,21.158) 92.859,21.158 v1(97.558,16.459) ; DB37.10@93.748,41.199 93.748,44.247 95.145,45.644 115.617,45.644 DB37.20@117.268,43.993 118.665,42.596 DB37.1@118.665,41.199 v1(120.722,41.199) ; v1(99.361,14.656) 100.021,15.316 125.239,15.316 125.671,14.884 133.118,14.884 138.121,19.888 139.569,19.888 144.395,15.062 169.109,15.062 174.672,20.625 174.672,41.808 171.635,44.846 to_screen.3@171.635,46.473 ; v1(104.924,22.581) 104.924,21.609 R46.1@105.265,21.268 106.756,22.758 118.193,22.758 R42.1@119.732,21.219 ; v1(105.508,24.359) 105.508,27.127 105.482,27.153 R48.1@105.533,27.203 ; v1(119.732,22.708) R42.1@119.732,21.219 ; v1(119.732,24.333) 119.706,24.359 R44.1@119.706,27.203 121.434,28.931 121.434,35.636 v1(122.373,36.576) ; v1(133.88,23.597) 133.88,21.308 R34.1@133.788,21.217 134.888,21.217 135.607,20.498 135.607,18.263 134.362,17.018 129.003,17.018 128.444,17.577 128.444,18.771 126.252,20.963 R42.1@119.988,20.963 R42.1@119.732,21.219 ; v1(133.88,25.273) R40.1@133.88,27.203 ; R36.1@146.63,27.203 146.63,25.222 v1(146.656,25.197) ; v1(146.656,23.114) 146.656,21.731 R38.1@146.472,21.547 155.35,21.547 155.355,21.552 ; v1(154.708,34.214) 154.682,34.239 154.682,22.225 155.355,21.552 ; to_main_control.3@160.611,46.203 161.983,47.574 164.995,47.574 ; C21.2@161.134,28.08 161.197,28.143 MAX3232.15@163.166,28.143 165.045,28.143 166.696,26.492 166.696,19.634 165.071,18.009 158.899,18.009 155.355,21.552 ; to_screen.3@171.538,46.376 170.339,47.574 164.995,47.574 ; C23.1@172.221,22.962 172.792,23.533 172.792,40.767 169.643,43.917 166.976,43.917 164.995,45.898 164.995,47.574 ; 28.343,40.386 32.698,36.03 33.614,36.03
green532_channel1_adc: MCU.34 R63.1 R64.2 | length 11.5
  Top Layer w0.254: MCU.34@56.403,27.642 56.403,29.635 v1(56.486,29.718)
  Bottom Layer w0.254: R63.1@48.18,27.203 50.466,29.489 R64.2@52.422,29.489 52.65,29.718 v1(56.486,29.718)
green532_channel1_adc_con: DB37.18 R63.2 | length 28.7
  Bottom Layer w0.254: R63.2@48.18,29.489 R63.2@48.18,29.947 ; R63.2@48.18,30.099 R63.2@48.18,29.947 ; DB37.18@71.599,41.199 70.532,40.132 58.365,40.132 R63.2@48.18,29.947
green532_channel1_state: DB37.28 led16.2 MCU.62 | length 118.1
  Top Layer w0.254: led16.2@7.54,3.2 5.838,4.902 5.838,9.627 7.248,11.036 v1(9.255,11.036) ; v1(44.446,20.041) 44.446,20.117 44.946,20.617 MCU.62@46.878,20.617 49.244,20.617 49.887,21.26 v1(50.364,21.26) ; v1(53.438,24.308) 54.251,24.308 54.759,24.816 v1@60.169,24.816 ; v1(72.107,36.246) 72.107,36.834 73.804,38.532 93.24,38.532 95.119,40.411 DB37.28@95.119,43.993
  Bottom Layer w0.254: v1(9.255,11.036) 33.816,11.036 40.255,17.475 40.509,17.475 43.075,20.041 v1(44.446,20.041) ; v1(50.364,21.26) 53.412,24.308 v1(53.438,24.308) ; v1(60.169,24.79) 69.084,24.79 72.107,27.813 v1(72.107,36.246)
green532_dac_output: DB15.8 MCP4728.9 | length 6.7
  Bottom Layer w0.254: MCP4728.9@16.347,36.416 16.347,40.506 17.04,41.199 DB15.8@18.665,41.199
green532_enable: DB15.7 Q4.3 | length 8.6
  Top Layer w0.254: Q4.3@20.384,33.056 21.434,34.105 DB15.7@21.434,41.199
green532_enable_pin: MCU.77 R14.2 | length 75.1
  Top Layer w0.254: v1(5.965,30.886) 5.965,30.988 7.032,32.055 R14.2@13.687,32.055 ; v1(38.989,11.125) 39.13,11.266 v1(45.095,11.266) ; MCU.77@48.903,12.592 48.903,11.545 v1(49.425,11.024)
  Bottom Layer w0.254: v1(5.965,30.886) 5.965,10.973 7.743,9.195 37.059,9.195 v1(38.989,11.125) ; v1(45.095,11.266) 49.182,11.266 v1(49.425,11.024)
green_channel1_adc: MCU.31 R45.1 R46.2 | length 67
  Top Layer w0.254: MCU.31@57.903,27.642 57.903,30.932 58.543,31.572 101.368,31.572 v1(101.418,31.521) ; v1(98.701,19.583) v1(98.701,22.504)
  Bottom Layer w0.254: v1(98.701,19.583) 99.259,19.025 R45.1@101.647,19.025 101.69,18.982 R46.2@105.265,18.982 ; v1(98.701,22.504) 98.726,22.53 98.726,28.829 v1(101.418,31.521)